# Altium PCB PCB1.PcbDoc
Units mil, origin at the board's own origin, x right, y up, seen from the top; angles counter-clockwise.
Board outline 1030.53 x 1027.03 mil, 2 copper layers (Top Layer, Bottom Layer); 45 components, 42 nets, 229 pads, 70 vias.
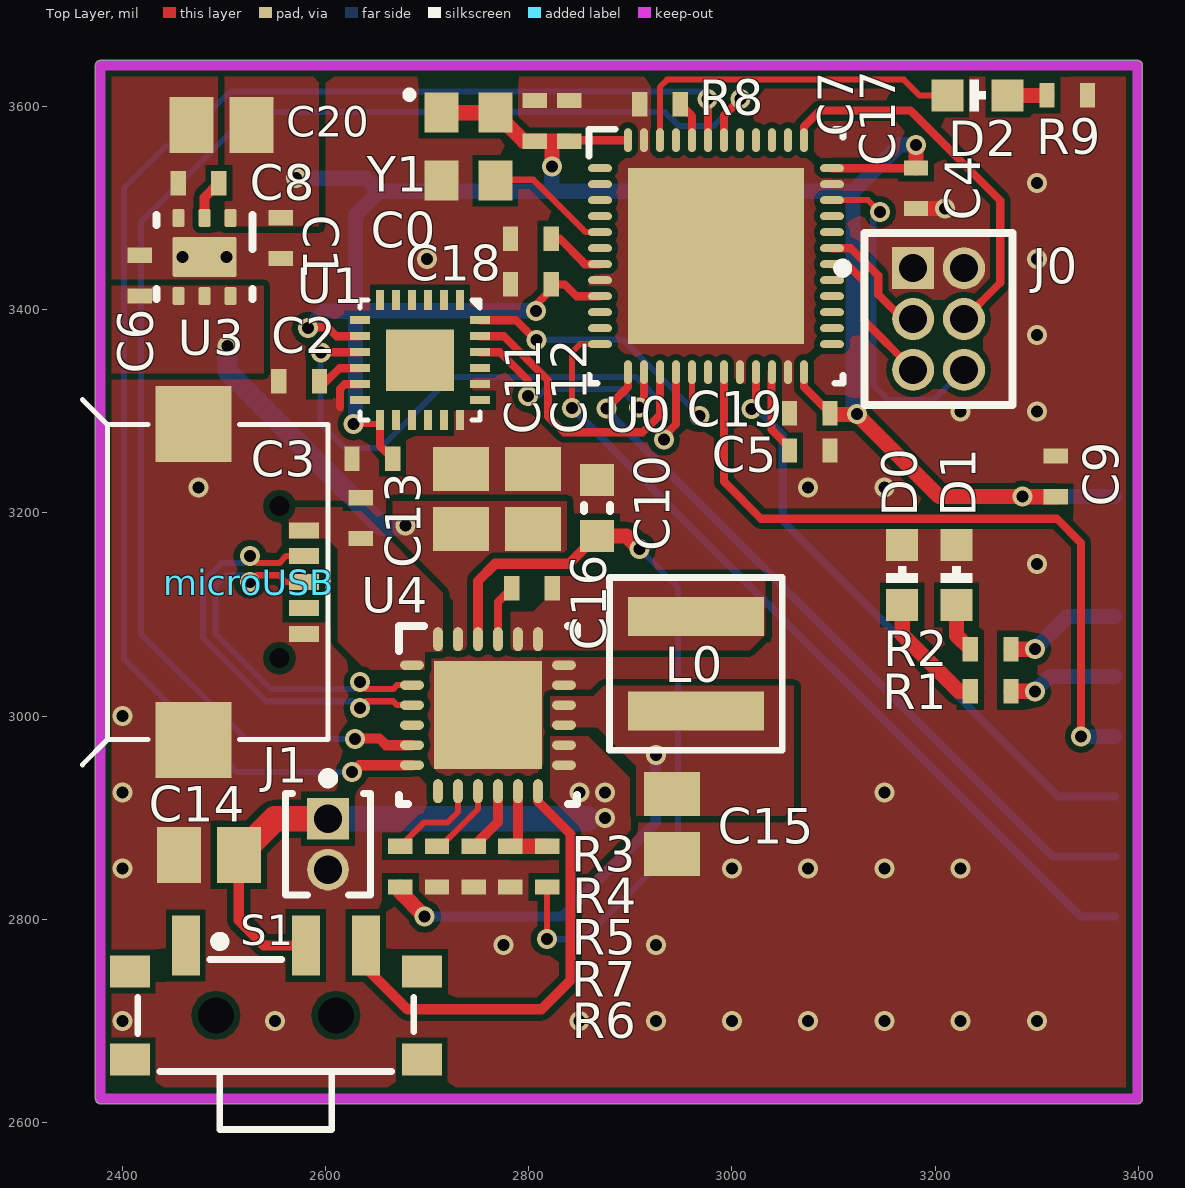
[diagram p0: Top Layer view]
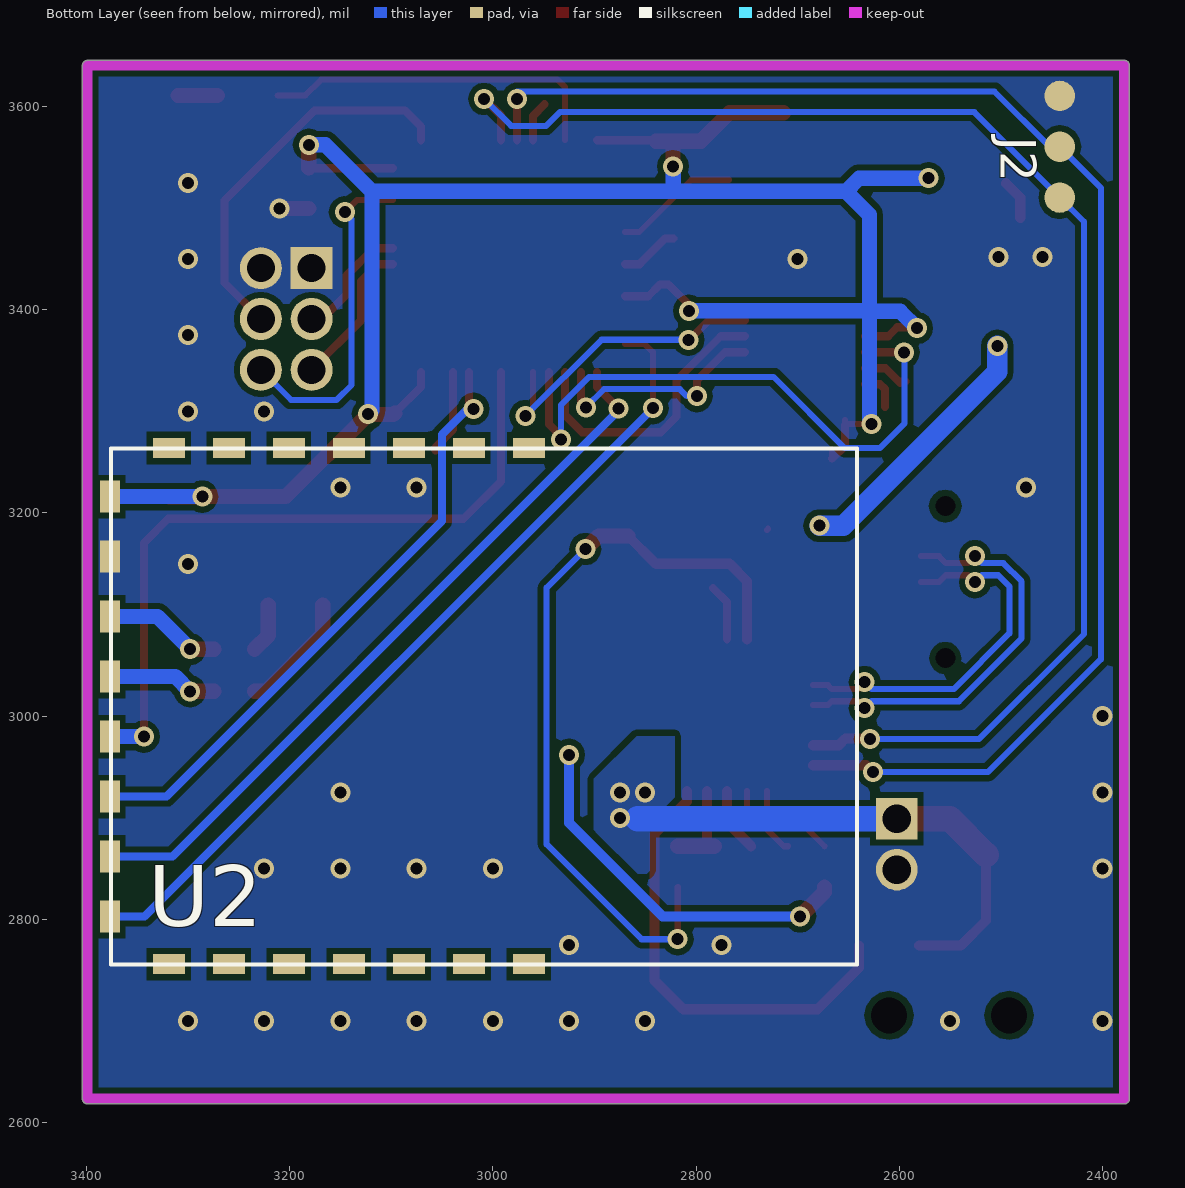
[diagram p1: Bottom Layer view, seen from below]

## Layer stack, top to bottom
Top Solder: solder mask 0.4, Solder Resist, Dk 3.5
Top Layer: signal copper 1.4
Dielectric 1: dielectric 12.6, FR-4, Dk 4.8
Bottom Layer: signal copper 1.4
Bottom Solder: solder mask 0.4, Solder Resist, Dk 3.5

## Board outline
2378.5,2618.49 cw(c2378.5,2623.5) 2373.49,2623.5 2373.49,3640.5 cw(c2378.5,3640.5) 2378.5,3645.51 3399,3645.51 cw(c3399,3640.5) 3404.01,3640.5 3404.01,2623.5 cw(c3399,2623.5) 3399,2618.49

## Design rules (kind name [scope] priority, off if disabled: settings)
Clearance Clearance_1 [All] p1: gap=6 ignorepadtopadclearanceinfootprint=FALSE except(0: Arc-Hole Track-Hole SMDPad-Hole THPad-Hole Via-Hole Fill-Hole Poly-Hole Region-Hole Text-Hole)
DiffPairsRouting [All] p1: maxlimit=10 minlimit=6 mostfreqgap=10 toplayer_minwidth=6 toplayer_maxwidth=15 toplayer_prefwidth=15 bottomlayer_minwidth=6 bottomlayer_maxwidth=15 bottomlayer_prefwidth=15 maxuncoupledlength=500
MinimumSolderMaskSliver [All] p1: minsoldermaskwidth=1
PolygonConnect [All] p1: connectstyle=Direct reliefconductorwidth=10 reliefentries=4 polygonreliefangle="90 Angle" airgapwidth=10
RoutingVias [All] p1: holewidth=11.81 width=19.68 viastyle="Through Hole" minholewidth=11.81 minwidth=19.68 maxholewidth=28 maxwidth=50
SolderMaskExpansion [All] p1: expansion=4
Width [All] p1: maxlimit=80 minlimit=6 preferedwidth=6
28 further rules are at their usual default settings.

## Components (designator, comment, footprint, x,y, rotation, side; value= is the part's Value field where it differs from the comment)
C0 "0402YC132KAT2A" 0402S 2802,3470 r180 top
C1 "0402YC132KAT2A" 0402S 2556,3470.5 r270 top
C2 "0402YC132KAT2A" 0402S 2574,3329.5 r180 top
C3 "0402YC132KAT2A" 0402S 2646,3253.5 r180 top
C4 "0402YC132KAT2A" 0402S 3181.1,3519.68 r270 top
C5 "0402YC132KAT2A" 0402S 3076.55,3261.5 r0 top
C6 "0402YC132KAT2A" 0402S 2416.94,3433.61 r90 top
C7 "0402YC132KAT2A" 0402S 2806,3586 r90 top
C8 "0402YC132KAT2A" 0402S 2474.94,3524.61 r180 top
C9 "0402YC132KAT2A" 0402S 3318.5,3236 r90 top
C10 "VJ1206Y473KXEAT5Z" 0603L 2867,3205 r90 top
C11 "VJ1206Y473KXEAT5Z" 0805L 2733.5,3214 r90 top
C12 "VJ1206Y473KXEAT5Z" 0805L 2804,3214 r90 top
C13 "0402YC132KAT2A" 0402S 2634.5,3195 r90 top
C14 "VJ1206Y473KXEAT5Z" 0805L 2485,2863.5 r180 top
C15 "VJ1206Y473KXEAT5Z" 0805L 2941,2894 r270 top
C16 "0402YC132KAT2A" 0402S 2803.15,3125.98 r180 top
C17 "0402YC132KAT2A" 0402S 2840,3586 r90 top
C18 "0402YC132KAT2A" 0402S 2802,3425 r0 top
C19 "0402YC132KAT2A" 0402S 3076.55,3298.28 r0 top
C20 "VJ1206Y473KXEAT5Z" 0805L 2497.5,3582 r180 top
D0 "0603" LED_0603 3167.5,3109.5 r90 top
D1 "0603" LED_0603 3221,3109.5 r90 top
D2 "0603" LED_0603 3212,3611 r0 top
J0 "GRPB032VWVN-RC" Sullins_GRPB032VWVN-RC 3203.35,3390.94 r0 top
J1 "GRPB021VWVN-RC" Sullins_GRPB021VWVN-RC 2602.36,2874.02 r270 top
J2 "850-10-003-10-001000" Mill-Max_850-10-003-10-001000 2442,3560.5 r270 bottom
L0 "XFL4020-222MEB" XFL4020 2964.5,3051.5 r270 top
microUSB "microUSB" Micro_USB 2578.74,3182.98 r0 top
R1 "PCF0402-12-10KBT1" 0402S 3254.5,3024.5 r0 top
R2 "PCF0402-12-10KBT1" 0402S 3254.5,3066 r0 top
R3 "PCF0402-12-10KBT1" 0402S 2673.54,2852 r90 top
R4 "PCF0402-12-10KBT1" 0402S 2709.65,2852 r90 top
R5 "PCF0402-12-10KBT1" 0402S 2745.77,2852 r90 top
R6 "PCF0402-12-10KBT1" 0402S 2818,2852 r270 top
R7 "PCF0402-12-10KBT1" 0402S 2781.88,2852 r90 top
R8 "PCF0402-12-10KBT1" 0402S 2929.13,3602.36 r0 top
R9 "PCF0402-12-10KBT1" 0402S 3330,3611 r180 top
S1 "EG1257" SW_EG1257 2551,2705.5 r0 top
U0 "STM32F401CC" RSL0048B_NV 2984.25,3452.76 r0 top
U1 "MPU-6500" "QFN24 (3x3x0.9)" 2732.28,3405.51 r270 top
U2 "JDY-10" PCBComponent_1 2964.57,3263.98 r270 bottom
U3 "TPS73533DRVR" DRV0006A 2480.85,3452 r270 top
U4 "bq24295" RGE0024H_NV 2759.84,3000.98 r0 top
Y1 "625L3I006M00000" OSC_CTS_625 2740.5,3560.5 r0 top

## Footprints (in the part's own frame and the unit in brackets; to place one, negate y for a bottom-side part, rotate by r counter-clockwise, add the part's x,y. Pads: shape width x height; smd on the part's side, far side on the other; paste and mask are expansions set on the pad)
0402S [mil] "Based on C0402S footprint from PADS legacy"
  rect 15x24 smd: 1(-20,0) 2(20,0)
  body extent -22,-12 22,12, height 24
0603L [mm] "0603 from SM-752 data"
  rect 0.8x0.85 smd: 1(-0.7,0) 2(0.7,0)
  silkscreen extent -0.07,-0.33 0.07,0.33, body extent -0.87,-0.47 0.87,0.47, height 0.85
0805L [mm] "0805 from SM-752 data"
  rect 1.1x1.4 smd: 1(-0.75,0) 2(0.75,0)
  body extent -1.1,-0.72 1.1,0.72, height 1.45
DRV0006A [mm] "SON, 6-Leads, Body 2x2mm, Pitch 0.65mm, Thermal Pad 1.6x1mm, TI Recommended"
  rrect33% 0.45x0.3 smd: 1(-0.975,0.65) 2(-0.975,0) 3(-0.975,-0.65) 4(0.975,-0.65) 5(0.975,0) 6(0.975,0.65)
  rrect10% 1x1.6 smd paste-0.5: 7(0,0)
  silkscreen extent -1.05,-1.2 1.05,1.2, body extent -1.05,-1.05 1.05,1.05, height 0.81
LED_0603 [mm]
  rect 0.8x0.8 smd: 1(0,0) 2(1.5,0)
  silkscreen extent 0.56,-0.39 0.97,0.39
Micro_USB [mm] "Micro_USB Dock 5 Pin"
  round 0 hole 0.5: 0(-0.611,-3.195) 0(-0.611,0.605)
  rect 0.75x0.4 smd: 1(0,0) 2(0,-0.648) 3(0,-1.298) 4(0,-1.948) 5(0,-2.598)
  rect 1.9x1.9 smd: 5(-2.761,-5.245) 5(-2.761,2.655)
  silkscreen extent -5.54,-5.86 0.6,3.27, body extent -5.32,-5.29 0.11,2.69, height 2.72
Mill-Max_850-10-003-10-001000 [mil] "Header, 1.27 mm, 3x1, Gold, Straight, TH"
  round 30 smd: 1(-50,0) 2(0,0) 3(50,0)
OSC_CTS_625 [mm] "CTS"
  rect 0.85x1 smd: 1(-0.675,0.85) 2(-0.675,-0.85) 3(0.675,-0.85) 4(0.675,0.85)
  silkscreen extent -1.52,1.25 -1.43,1.35, body extent -1.1,-1.35 1.1,1.35, height 1.02
PCBComponent_1 [mm]
  rect 0.5x0.8 smd: 1(0,0) 2(0,-1.5) 3(0,-3) 4(0,-4.5) 5(0,-6) 6(0,-7.5) 7(0,-9) 16(12.905,-9) 17(12.905,-7.5) 18(12.905,-6) 19(12.905,-4.5) 20(12.905,-3) 21(12.905,-1.5) 22(12.905,0)
  rect 0.8x0.5 smd: 8(1.215,-10.475) 9(2.715,-10.475) 10(4.215,-10.475) 11(5.715,-10.475) 12(7.215,-10.475) 13(8.715,-10.475) 14(10.215,-10.475) 15(11.715,-10.475)
  silkscreen extent 0.02,-10.45 12.92,8.2
"QFN24 (3x3x0.9)" [mm]
  rect 0.5x0.2 smd: 1(-0.1,0) 2(-0.1,-0.4) 3(-0.1,-0.8) 4(-0.1,-1.2) 5(-0.1,-1.6) 6(-0.1,-2) 13(2.9,-2) 14(2.9,-1.6) 15(2.9,-1.2) 16(2.9,-0.8) 17(2.9,-0.4) 18(2.9,0)
  rect 0.2x0.5 smd: 7(0.4,-2.5) 8(0.8,-2.5) 9(1.2,-2.5) 10(1.6,-2.5) 11(2,-2.5) 12(2.4,-2.5) 19(2.4,0.5) 20(2,0.5) 21(1.6,0.5) 22(1.2,0.5) 23(0.8,0.5) 24(0.4,0.5)
  rect 1.54x1.7 smd: 25(1.4,-1)
  silkscreen extent -0.1,-2.5 2.9,0.5
RGE0024H_NV [mm] "QFN, 24-Leads, Body 4x4mm, Pitch 0.5mm, Thermal Pad 2.7x2.7mm, TI Recommended"
  oval 0.6x0.24 smd: 1(-1.9,1.25) 2(-1.9,0.75) 3(-1.9,0.25) 4(-1.9,-0.25) 5(-1.9,-0.75) 6(-1.9,-1.25) 13(1.9,-1.25) 14(1.9,-0.75) 15(1.9,-0.25) 16(1.9,0.25) 17(1.9,0.75) 18(1.9,1.25)
  oval 0.24x0.6 smd: 7(-1.25,-1.9) 8(-0.75,-1.9) 9(-0.25,-1.9) 10(0.25,-1.9) 11(0.75,-1.9) 12(1.25,-1.9) 19(1.25,1.9) 20(0.75,1.9) 21(0.25,1.9) 22(-0.25,1.9) 23(-0.75,1.9) 24(-1.25,1.9)
  rect 2.7x2.7 smd paste-1.35: 25(0,0)
  silkscreen extent -2.22,-2.22 2.22,2.22, body extent -2.07,-2.07 2.07,2.07, height 1.01
RSL0048B_NV [mm]
  oval 0.6x0.2 smd: 1(-2.9,2.2) 2(-2.9,1.8) 3(-2.9,1.4) 4(-2.9,1) 5(-2.9,0.6) 6(-2.9,0.2) 7(-2.9,-0.2) 8(-2.9,-0.6) 9(-2.9,-1) 10(-2.9,-1.4) 11(-2.9,-1.8) 12(-2.9,-2.2) 25(2.9,-2.2) 26(2.9,-1.8) 27(2.9,-1.4) 28(2.9,-1) 29(2.9,-0.6) 30(2.9,-0.2) 31(2.9,0.2) 32(2.9,0.6) 33(2.9,1) 34(2.9,1.4) 35(2.9,1.8) 36(2.9,2.2)
  oval 0.2x0.6 smd: 13(-2.2,-2.9) 14(-1.8,-2.9) 15(-1.4,-2.9) 16(-1,-2.9) 17(-0.6,-2.9) 18(-0.2,-2.9) 19(0.2,-2.9) 20(0.6,-2.9) 21(1,-2.9) 22(1.4,-2.9) 23(1.8,-2.9) 24(2.2,-2.9) 37(2.2,2.9) 38(1.8,2.9) 39(1.4,2.9) 40(1,2.9) 41(0.6,2.9) 42(0.2,2.9) 43(-0.2,2.9) 44(-0.6,2.9) 45(-1,2.9) 46(-1.4,2.9) 47(-1.8,2.9) 48(-2.2,2.9)
  rect 4.4x4.4 smd paste-2.2: 49(0,0)
  silkscreen extent -3.17,-3.17 3.17,3.17, body extent -3.07,-3.07 3.07,3.07, height 1.01
Sullins_GRPB021VWVN-RC [mil] "Sullins"
  rect 41x41 hole 28: 1(-25,0)
  round 41 hole 28: 2(25,0)
  silkscreen extent -70,-42 50,42, body extent -50,-42 50,42, height 157
Sullins_GRPB032VWVN-RC [mm] "Sullins"
  rect 1.05x1.05 hole 0.7 paste+0: 1(-0.635,1.27)
  round 1.05 hole 0.7 paste+0: 2(0.635,1.27) 3(-0.635,0) 4(0.635,0) 5(-0.635,-1.27) 6(0.635,-1.27)
  silkscreen extent -2.51,-2.15 1.85,2.15, body extent -1.85,-2.15 1.85,2.15, height 4
SW_EG1257 [mm] "E-SWITCH"
  rect 0.7x1.5 smd: 1(-2.25,1.75) 2(0.75,1.75) 3(2.25,1.75)
  rect 1x0.8 smd: 4(-3.65,-1.1) 5(-3.65,1.1) 6(3.65,-1.1) 7(3.65,1.1)
  round 0 hole 0.9 unplated: MH-1(-1.5,0) MH-1(1.5,0)
  silkscreen extent -3.45,-2.85 3.45,1.97, body extent -3.9,-2.85 3.9,2.2, height 1.6
XFL4020 [mm] "Coilcraft XFL4020 7/18/12"
  rect 0.98x3.4 smd: 1(-1.181,0) 2(1.181,0)
  silkscreen extent -2.16,-2.16 2.16,2.16, body extent -2.15,-2.15 2.15,2.15, height 2.1

## Part data
C0 C1 C2 C3 C4 C5 C6 C7 C8 C9 C13 C16 C17 C18 C19: "CAP, CERM, 1300 pF, 16 V, +/- 10%, X7R, 0402"
C10 C11 C12 C14 C15 C20: "CAP, CERM, 0.047 £gF, 500 V, +/- 10%, X7R, 1206"
D0 D1 D2: library part LED_0603
J0: "Header, 50mil, 3x2, Gold, TH"
J1: "Header, 50mil, 2x1, Gold, TH"
J2: "Header, 50mil, 3x1, Gold, TH"
L0: "Inductor, Shielded, Composite, 2.2uH, 3.7A, 0.02 ohm, SMD"
R1 R2 R3 R4 R5 R6 R7 R8 R9: "RES, 10.0 k, 0.1%, 0.063 W, 0402"
S1: "Switch, Slide, SPDT, 0.3A, SMT"
U2: library part Component_1
U3: "Single Output High PSRR LDO, 500 mA, Fixed 3.3 V Output, 2.7 to 6.5 V Input, with Low IQ, 6-pin SON (DRV), -40 to 125 degC, Green (RoHS & no Sb/Br)"
Y1: "Oscillator, 6MHz, 3.3V, SMD"

## Via types
v1: diameter 19.68, hole 11.81, Top Layer to Bottom Layer, tented both sides, 70 vias

## Nets (pads, with @x,y where several pads share a name; then routed paths per layer and width w, separated by ;. In a path a pad name is that pad's centre, name@x,y a point inside that pad or via, vN(x,y) a via of type N, cw(c..) or ccw(c..) an arc to the next point about the centre after c; other vN are vias at no path point)
3.3V: C1.1 C3.1 C4.1 C7.1 C9.1 C17.1 C18.2 C19.2 C20.1 U0.9 U0.24 U0.36 U0.48 U1.8 U1.13 U2.8 U3.1 Y1.1 Y1.4 | length 2291.5
  Top Layer w6: v1(2627.5,3287.5) 2652.5,3287.5 2653.5,3286.5 2653.54,3286.54 U1.13 ; C3.1 C3.1@2666,3262.5 ; v1@2806.5,3404.5 2807,3404 v1(2807,3399)
  Top Layer w8: v1(2582.5,3382) 2583.34,3382.84 2602,3382.84 2610.83,3374.02 U1.8 ; U1.13@2653.54,3286.54 2653.54,3265.96 C3.1 ; v1@2806.5,3404.5 2827,3425 2835.4,3425 2847.02,3413.39 U0.9 ; C17.1 2840.93,3566.93 U0.48 ; U0.24 3070.87,3323.96 C19.2 ; U0.36 3180.79,3539.37 C4.1
  Top Layer w15: Y1.1 Y1.4 2795.04,3566 C7.1 2822.75,3566 ; v1(2822.75,3541.25) 2822.75,3566 ; C17.1@2839.5,3566 2822.75,3566 ; C19.2 3097.83,3297 v1@3123,3297 ; v1(3123,3297.5) v1@3123,3297 ; C4.1 v1(3181.1,3562.4) ; C9.1 3286.14,3216 v1(3286,3216.14) 3203.86,3216.14 v1@3123,3297
  Bottom Layer w15: v1(2571,3529.5) 2639.64,3529.5 2652.5,3516.64 ; v1(2582.5,3382) 2599,3398.5 2629.34,3398.5 ; v1(2627.5,3287.5) 2629.34,3289.34 2629.34,3398.5 ; v1(2807,3399) 2629.84,3399 2629.34,3398.5 ; v1(2822.75,3541.25) 2822.5,3541 2822.5,3516.64 ; v1(3123,3297.5) 3122.5,3297.5 3119,3301 3119,3516.64 ; v1(3181.1,3562.4) 3164.76,3562.4 3119,3516.64 ; v1(3286,3216.14) U2.8 ; 2629.34,3398.5 2629.34,3493.48 2652.5,3516.64 ; 2652.5,3516.64 2822.5,3516.64 ; 2822.5,3516.64 3119,3516.64
Battery: C14.1 J1.1 S1.2 U4.13 U4.14 | length 498.4
  Top Layer w10: C14.1 2514.53,2798.97 2539.1,2774.4 S1.2
  Top Layer w25: C14.1 2550.04,2899.02 J1.1
  Bottom Layer w25: J1.1 2857.48,2899.02
  other v1: 2875,2900 2850,2925 2875,2925
BT_DISC: U0.19 U2.12 | length 708.1
  Top Layer w8: U0.19 2992.13,3230.87 3028.7,3194.3 3319.7,3194.3 3343.5,3170.5 v1(3343.5,2979.92)
  Bottom Layer w15: v1(3343.5,2979.92) U2.12
BT_PWRC: U0.21 U2.13 | length 604
  Top Layer w8: v1(3019,3302.5) 3023.62,3307.12 U0.21
  Bottom Layer w8: v1(3019,3302.5) 3024.83,3302.5 3050,3277.33 3050,3192 3321.13,2920.87 U2.13
BT_RX: U0.13 U2.14 | length 728.9
  Top Layer w8: v1(2876.5,3303) 2897.64,3324.14 U0.13
  Bottom Layer w8: v1(2876.5,3303) 2876.5,3300.77 3315.46,2861.81 U2.14
BT_TX: U0.12 U2.15 | length 827.7
  Top Layer w6: v1(2842.52,3303.15) 2842.52,3358.27 2850.39,3366.14 U0.12
  Bottom Layer w8: v1(2842.52,3303.15) 3342.91,2802.76 U2.15
D+: microUSB.3 U4.2 | length 370.5
  Top Layer w6: v1(2525.5,3131.84) 2532.34,3138.69 2554.18,3138.69 2560.98,3131.89 microUSB.3 ; v1(2634,3033.51) 2634,3032.67 2640,3026.67 2666.39,3026.67 2670.23,3030.51 U4.2
  Bottom Layer w6: v1(2525.5,3131.84) 2518.66,3138.69 2502.5,3138.69 2491.5,3127.69 2491.5,3081.5 2546.33,3026.67 2627.16,3026.67 v1(2634,3033.51)
D-: microUSB.2 U4.3 | length 410.2
  Top Layer w6: v1(2525.5,3157.53) 2532.34,3150.69 2554.18,3150.69 2560.98,3157.48 microUSB.2 ; v1(2634,3007.83) 2634,3008.67 2640,3014.67 2666.39,3014.67 2670.23,3010.83 U4.3
  Bottom Layer w6: v1(2525.5,3157.53) 2518.66,3150.69 2497.53,3150.69 2479.5,3132.66 2479.5,3076.53 2541.36,3014.67 2627.16,3014.67 v1(2634,3007.83)
GND: C0.2 C1.2 C2.2 C3.2 C4.2 C5.2 C6.2 C7.2 C8.2 C9.2 C10.2 C11.2 C12.2 C13.2 C14.2 C15.2 C17.2 C18.1 C19.1 C20.2 D0.2 D1.2 J0.1 J0.2 J1.2 J2.1 microUSB.5 R4.1 R5.1 R7.1 R8.1 R9.1 U0.8 U0.20 U0.23 U0.35 U0.47 U0.49 U1.11 U1.18 U1.20 U2.9 U3.3 U3.7 U4.17 U4.18 U4.25 Y1.2 | length 68
  Top Layer w8: 2614.02,3304.52 2614.02,3322.02 2618.77,3326.77 U1.11
  Top Layer w15: C4.2 v1(3209.82,3499.68)
  other v1: 2400,2700 2550,2700 2850,2700 2925,2700 3000,2700 3075,2700 3150,2700 3225,2700 3300,2700 2775,2775 2925,2775 2400,2850 3000,2850 3075,2850 3150,2850 3225,2850 2400,2925 3150,2925 2400,3000 3300,3150 2475,3225 3075,3225 3150,3225 3225,3300 3300,3300 3300,3375 2700,3450 3300,3450 2459.19,3452 2502.5,3452 3300,3525
ICE_RX: J0.3 U0.31 | length 119.8
  Top Layer w8: U0.31 3117.17,3460.63 3143.92,3433.88 3143.92,3415.13 3168.11,3390.94 J0.3
ICE_TX: J0.5 U0.30 | length 145.6
  Top Layer w8: U0.30 3113.12,3444.88 3129.92,3428.08 3129.92,3389.37 J0.5
NetC0_1: C0.1 U0.7 | length 58.7
  Top Layer w8: C0.1 2830.44,3470 2853.5,3446.94 2853.5,3446.5 2855.12,3444.88 U0.7
NetC2_1: C2.1 U1.10 | length 47.3
  Top Layer w8: C2.1 C2.1@2600.48,3329.5 ; C2.1@2599,3328.02 C2.1@2600.48,3329.5 ; U1.10 2613.5,3342.52 C2.1@2600.48,3329.5
NetC5_1: C5.1 U0.22 | length 84.5
  Top Layer w8: U0.22 3039.05,3338.26 3039.05,3282.13 3056.55,3264.63 C5.1
NetC8_1: C8.1 U3.2 | length 40.1
  Top Layer w10: U3.2 2480.85,3510.52 C8.1
NetC16_1: C16.1 L0.1 U4.19 U4.20
NetC16_2: C16.2 U4.21 | length 55.8
  Top Layer w8: U4.21 2769.68,3112.52 C16.2
NetD0_1: D0.1 R1.1 | length 119.3
  Top Layer w15: D0.1 3167.5,3080.25 3223.25,3024.5 R1.1
NetD1_1: D1.1 R2.1 | length 49.1
  Top Layer w15: D1.1 3221,3079.5 R2.1
NetD2_2: D2.2 R9.2 | length 38.9
  Top Layer w15: D2.2 R9.2
NetR1_2: R1.2 U2.11 | length 108.5
  Top Layer w15: R1.2 v1(3298,3024.5)
  Bottom Layer w15: v1(3298,3024.5) 3312.48,3038.98 U2.11
NetR2_2: R2.2 U2.10 | length 115.7
  Top Layer w15: R2.2 v1(3298,3066)
  Bottom Layer w15: v1(3298,3066) 3330.03,3098.03 U2.10
NetR3_2: R3.2 U4.8 | length 91.1
  Top Layer w6: R3.2 2697.04,2895.5 2720,2895.5 2730.31,2905.81 U4.8
NetR4_2: R4.2 U4.9 | length 73.1
  Top Layer w6: R4.2 2713.47,2872 2750,2908.53 U4.9
NetR5_2: R5.2 U4.10 | length 64.1
  Top Layer w10: R5.2 2769.68,2895.92 U4.10
NetR6_1: R6.1 R7.2 U4.11 | length 82.8
  Top Layer w10: R7.2@2789.37,2879.49 U4.11
  Top Layer w15: R7.2 R6.1
NetR8_2: R8.2 U0.44 | length 40.2
  Top Layer w8: R8.2 2960.63,3590.87 U0.44
OSC_IN: U0.5 Y1.3 | length 123.9
  Top Layer w6: Y1.3@2767.57,3528.04 2804.46,3528.04 2856.12,3476.38 U0.5
PMID: C6.1 C11.1 C12.1 U3.4 U3.5 U3.6 U4.23 | length 265.1
  Top Layer w6: C11.1@2729,3184.47 C11.1@2730.31,3183.16
  Bottom Layer w20: v1(2503.5,3364.5) 2503.5,3339 2655,3187.5 v1(2678.5,3187.5)
PWM0: D2.1 U0.46 | length 344.7
  Top Layer w6: U0.46 2929.13,3619.37 2936.27,3626.5 3169,3626.5 3184.5,3611 D2.1
QON: S1.3 U4.12 | length 451.6
  Top Layer w10: S1.3 2639.58,2752.42 2680.5,2711.5 2812.5,2711.5 2841,2740 2841,2884.06 2809.05,2916 U4.12
REGN: C10.1 R6.2 U4.22 | length 765.5
  Top Layer w6: v1(2818,2780.5) R6.2
  Top Layer w10: U4.22 2750,3133.04 2766.96,3150 2839.56,3150 C10.1
  Top Layer w15: C10.1 2896.06,3177.44 v1(2909,3164.5)
  Bottom Layer w6: v1(2818,2780.5) 2853.5,2780.5 2947,2874 2947,3126.5 v1(2909,3164.5)
SCL: J2.3 U0.42 U4.5 | length 1417.5
  Top Layer w8: U0.42 2992.13,3591.13 v1(3008.5,3607.5)
  Top Layer w10: v1(2628.94,2977.36) 2629.57,2978 2653,2978 2659.54,2971.46 U4.5
  Bottom Layer w6: v1(2628.94,2977.36) 2521.64,2977.36 2418.17,3080.83 2418.17,3486.67 J2.3 2526.08,3594.58 2934,3594.58 2947.58,3581 2982,3581 v1(3008.5,3607.5)
SDA: J2.2 U0.43 U4.6 | length 1457.8
  Top Layer w6: v1(2976,3607.5) v1@2976,3611
  Top Layer w8: v1@2976,3611 2976.38,3610.62 U0.43
  Top Layer w10: v1(2625.98,2944.88) 2632.87,2951.77 U4.6
  Bottom Layer w6: v1(2625.98,2944.88) 2512.66,2944.88 2401.57,3055.96 2401.57,3520.07 J2.2 2452,3560.5 2506.34,3614.84 v1@2976,3614.84
SPI_MISO: U0.16 U1.9 | length 602.2
  Top Layer w8: v1(2595.5,3358) 2595.77,3358.27 U1.9 ; v1(2932.98,3272.35) 2932.98,3275.48 2944.88,3287.38 U0.16
  Bottom Layer w6: v1@2594.91,3358 2594.91,3287.9 2619.02,3263.78 2653.54,3263.78 2723.76,3333.99 2905.16,3333.99 2932.98,3306.17 v1(2932.98,3272.35)
SPI_MOSI: U0.17 U1.24 | length 301.2
  Top Layer w6: U0.17 2960.63,3302.87 v1(2968,3295.5)
  Top Layer w8: U1.24 2787.4,3389.76 2806.67,3370.5 v1(2807.5,3370.5)
  Bottom Layer w6: v1(2807.5,3370.5) 2893,3370.5 v1(2968,3295.5)
SPI_NSS: U0.14 U1.22 | length 230.9
  Top Layer w8: U1.22 2771.65,3358.27 2799.21,3330.71 v1(2799.21,3314.96) ; v1(2908.5,3304) 2913.39,3308.89 U0.14
  Bottom Layer w6: v1(2799.21,3314.96) 2808.97,3314.96 2816,3321.99 2890.61,3321.99 2908.6,3304 v1(2908.5,3304)
SPI_SCK: U0.15 U1.23 | length 286.2
  Top Layer w8: U1.23 2775.7,3374.02 2819.06,3330.67 2819.06,3295.12 2834.65,3279.53 2912.09,3279.53 2912.66,3280.1 2916.72,3284.16 2929.13,3296.57 U0.15
SW_CLK: J0.4 U0.37 | length 381.1
  Top Layer w8: U0.37 3070.87,3580.37 3086.5,3596 3175.56,3596 3264,3507.56 3264,3426.6 J0.4
SW_Data: J0.6 U0.34 | length 332.7
  Top Layer w6: U0.34 3133.86,3507.87 v1(3145.67,3496.06)
  Bottom Layer w6: v1(3145.67,3496.06) 3139,3489.39 3139,3326 3153.72,3311.28 3198.68,3311.28 J0.6
SYS: C15.1 L0.2 R3.1 U4.15 U4.16 | length 371.5
  Top Layer w15: R3.1 2673.54,2826.96 v1(2697.5,2803)
  Bottom Layer w10: v1(2697.5,2803) 2833,2803 2925,2895 v1(2925,2962)
VUSB: C13.1 microUSB.1 U4.1 U4.24
pads on no net: microUSB.0 microUSB.4 S1.1 S1.4 S1.5 S1.6 S1.7 S1.MH-1 U0.1 U0.2 U0.3 U0.4 U0.6 U0.10 U0.11 U0.18 U0.25 U0.26 U0.27 U0.28 U0.29 U0.32 U0.33 U0.38 U0.39 U0.40 U0.41 U0.45 U1.1 U1.2 U1.3 U1.4 U1.5 U1.6 U1.7 U1.12 U1.14 U1.15 U1.16 U1.17 U1.19 U1.21 U1.25 U2.1 U2.2 U2.3 U2.4 U2.5 U2.6 U2.7 U2.16 U2.17 U2.18 U2.19 U2.20 U2.21 U2.22 U4.4 U4.7

## Polygon pours and split planes (outlines as drawn)
PMID on Top Layer "Top Layer-No Net" (solid, pour order 40): 2725.5,3065 2725.5,3113.5 2690,3149 2666,3173 2666,3211.5 2837.5,3211.5 2837.5,3162.5 2832,3157 2759,3157 2743,3141 2741,3139 2741,3065
VUSB on Top Layer "Top Layer-No Net" (solid, pour order 38): 2563.5,3175 2601.5,3175 2612,3164.5 2612,3073.5 2640,3045.5 2697.5,3045.5 2697.5,3063.5 2715.5,3063.5 2715.5,3095.5 2715.5,3121.5 2631.5,3205.5 2605.5,3205.5 2563.5,3205.5
3.3V on Top Layer "Top Layer-No Net" (solid, pour order 36): 2500.5,3482 2500.5,3639.5 2577.5,3639.5 2584,3633 2593.5,3623.5 2593.5,3526.5 2593.5,3482
PMID on Top Layer "Top Layer-No Net" (solid, pour order 34): 2379,3423.5 2538.5,3423.5 2539,3424 2539,3337.5 2378.5,3337.5
Battery on Top Layer "Top Layer-No Net" (solid, pour order 30): 2821,2980.5 2821,2920 2845.5,2895.5 2845.5,2848 2848.5,2845 2857.5,2845 2896.5,2884 2900.5,2888 2900.5,2938.5 2858.5,2980.5 2854,2980.5
GND on Top Layer "Top Layer-No Net" (solid, pour order 44): 3399,3640.5 2378.5,3640.5 2378.5,2623.5 3399,2623.5
SYS on Top Layer "Top Layer-No Net" (solid, pour order 0): 2821,3019.5 2821,2989 2867.5,2989 2895,2961.5 2906,2950.5 2906,2902 3052,2902 3060,2910 3061,2911 3061,3030 2874,3030 2863.5,3019.5
NetC16_1 on Top Layer "Top Layer-No Net 1" (solid, pour order 28): 2782,3102.5 2782,3066 2786,3062 2783,3065 2789,3065 2814.5,3065 3017.5,3065 3033,3080.5 3032.5,3081 3032.5,3133.5 3028.5,3137.5 2817,3137.5 2817,3115.5 2804.5,3103 2782.5,3103
Battery on Bottom Layer "Top Layer-No Net" (solid, pour order 32): 2821,2980.5 2821,2920 2845.5,2895.5 2845.5,2848 2848.5,2845 2857.5,2845 2896.5,2884 2900.5,2888 2900.5,2938.5 2858.5,2980.5 2854,2980.5
GND on Bottom Layer "Top Layer-No Net" (solid, pour order 42): 2378.5,3640.5 3399,3640.5 3399,2623.5 2378.5,2623.5

## Keep-outs
Keep-Out Layer:
  lines w10: 2378.5,2623.5 3399,2623.5 3399,3640.5 2378.5,3640.5 2378.5,2623.5